# EAGLE board sx1509-breakout (EAGLE 7.1.0)
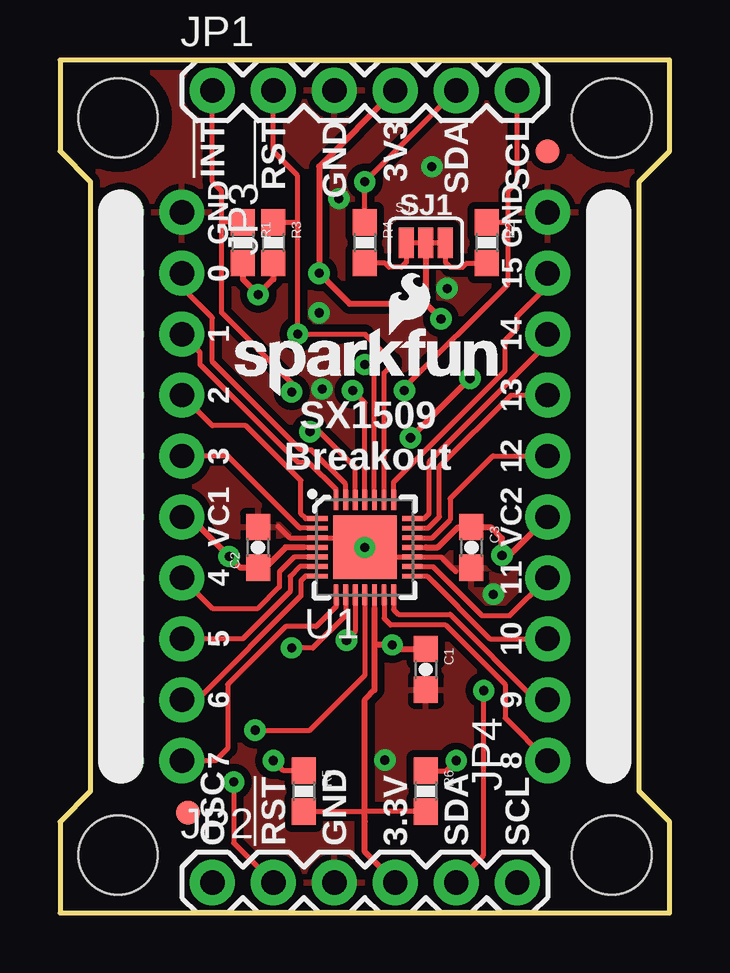
[diagram p0: board, top side]
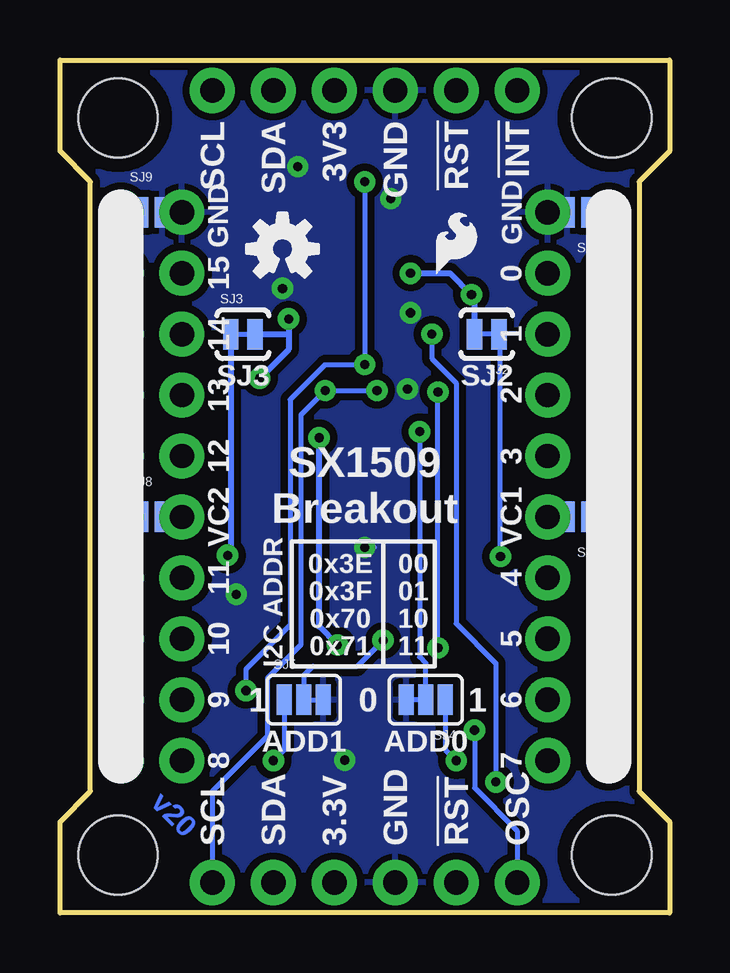
[diagram p1: board, bottom side, seen from below]

Size 25.4 x 35.56 mm. Coordinates in mm from the lower left corner, seen from the top.
Outline: 0,35.56 0,31.75 1.27,30.48 1.27,5.08 0,3.81 0,0 25.4,0 25.4,3.81 24.13,5.08 24.13,30.48 25.4,31.75 25.4,35.56 0,35.56
Copper layers (1*16): Top 0.035mm / dielectric 1.5mm / Bottom 0.035mm
Design rules "SparkFun-2-layer": minimum track width 7mil, minimum drill 15mil, track to track 8mil, track to pad 8mil, pad to pad 8mil, via to via 8mil, smd to smd 8mil, copper to edge 8mil, drill to drill 8mil, minimum pad ring 12mil, minimum via ring 10mil, stop-mask expansion 4mil, vias tented up to drill 20mil, thermal gap 10mil

## Footprints (pad centres in the part's own frame; a part is rotated, then mirrored left to right if it is on the bottom)
0603-CAP = smd 1.1 x 1: 1 -0.85,0; 2 0.85,0
1X06 = drill 1.016 pad 1.88: 1 0,0; 2 2.54,0; 3 5.08,0; 4 7.62,0; 5 10.16,0; 6 12.7,0
2X10_ROUND_NOSILK = drill 1.016 pad 1.88: 1 -11.43,-1.27; 2 -11.43,1.27; 3 -8.89,-1.27; 4 -8.89,1.27; 5 -6.35,-1.27; 6 -6.35,1.27; 7 -3.81,-1.27; 8 -3.81,1.27; 9 -1.27,-1.27; 10 -1.27,1.27; 11 1.27,-1.27; 12 1.27,1.27; 13 3.81,-1.27; 14 3.81,1.27; 15 6.35,-1.27; 16 6.35,1.27; 17 8.89,-1.27; 18 8.89,1.27; 19 11.43,-1.27; 20 11.43,1.27
FIDUCIAL-1X2 = smd 1 x 1: 1 0,0
0603-RES = smd 1.1 x 1: 1 -0.85,0; 2 0.85,0
PAD-JUMPER-3-3OF3_NC_BY_TRACE_YES_SILK_FULL_BOX = smd 0.635 x 1.27: 1 -0.813,0; 2 0,0; 3 0.813,0
PAD-JUMPER-2-NC_BY_TRACE_YES_SILK = smd 0.635 x 1.27: 1 -0.508,0; 2 0.508,0
PAD-JUMPER-3-2OF3_NC_BY_TRACE_YES_SILK_FULL_BOX = smd 0.635 x 1.27: 1 -0.813,0; 2 0,0; 3 0.813,0
PAD-JUMPER-2-NO_NO_SILK = smd 0.635 x 1.27: 1 -0.45,0; 2 0.45,0
STAND-OFF = hole 3.302: 0,0
QFN-28 = smd 0.85 x 0.2: 1 -1.975,1.2; 2 -1.975,0.8; 3 -1.975,0.4; 4 -1.975,0; 5 -1.975,-0.4; 6 -1.975,-0.8; 7 -1.975,-1.2; 15 1.975,-1.2; 16 1.975,-0.8; 17 1.975,-0.4; 18 1.975,0; 19 1.975,0.4; 20 1.975,0.8; 21 1.975,1.2 | smd 0.2 x 0.85: 8 -1.2,-1.975; 9 -0.8,-1.975; 10 -0.4,-1.975; 11 0,-1.975; 12 0.4,-1.975; 13 0.8,-1.975; 14 1.2,-1.975; 22 1.2,1.975; 23 0.8,1.975; 24 0.4,1.975; 25 0,1.975; 26 -0.4,1.975; 27 -0.8,1.975; 28 -1.2,1.975 | smd 2.65 x 2.65: 29 0,0

## Placement (x,y rotation side)
C1  0.1uF  [0603-CAP]  15.24,10.16 270 top
C2  0.1uF  [0603-CAP]  8.26,15.24 90 top
C3  0.1uF  [0603-CAP]  17.14,15.24 270 top
FRAME1  [CREATIVE_COMMONS]  -12.98,-17.78 0 top  (outside the outline)
JP1  [1X06]  6.35,34.29 0 top
JP2  [1X06]  6.35,1.27 0 top
JP3  [2X10_ROUND_NOSILK]  3.81,17.78 270 top
JP4  [2X10_ROUND_NOSILK]  21.59,17.78 90 top
JP9  FIDUCIAL1X2  [FIDUCIAL-1X2]  20.32,31.75 0 top
JP10  FIDUCIAL1X2  [FIDUCIAL-1X2]  5.33,4.19 0 top
LOGO1  SFE_LOGO_NAME_FLAME.1_INCH  [SFE_LOGO_NAME_FLAME_.1]  6.86,21.46 0 top
LOGO2  SFE_LOGO_FLAME.1_INCH  [SFE_LOGO_FLAME_.1]  10.03,26.29 0 bottom
LOGO3  OSHW-LOGOS  [OSHW-LOGO-S]  16.13,27.69 0 bottom
R1  10K  [0603-RES]  7.62,27.94 270 top
R2  10K  [0603-RES]  17.78,27.94 270 top
R3  10K  [0603-RES]  8.89,27.94 270 top
R4  10K  [0603-RES]  12.7,27.94 270 top
R5  10K  [0603-RES]  10.16,5.08 270 top
R6  10K  [0603-RES]  15.24,5.08 270 top
SJ1  [PAD-JUMPER-3-3OF3_NC_BY_TRACE_YES_SILK_FULL_BOX]  15.24,27.94 0 top
SJ2  [PAD-JUMPER-2-NC_BY_TRACE_YES_SILK]  7.62,24.13 180 bottom
SJ3  [PAD-JUMPER-2-NC_BY_TRACE_YES_SILK]  17.78,24.13 0 bottom
SJ4  [PAD-JUMPER-3-2OF3_NC_BY_TRACE_YES_SILK_FULL_BOX]  10.16,8.89 180 bottom
SJ5  [PAD-JUMPER-3-2OF3_NC_BY_TRACE_YES_SILK_FULL_BOX]  15.24,8.89 0 bottom
SJ6  A-VCC1  [PAD-JUMPER-2-NO_NO_SILK]  3.81,16.51 180 bottom
SJ7  A-GND  [PAD-JUMPER-2-NO_NO_SILK]  3.81,29.21 180 bottom
SJ8  B-VCC2  [PAD-JUMPER-2-NO_NO_SILK]  21.59,16.51 0 bottom
SJ9  B-GND  [PAD-JUMPER-2-NO_NO_SILK]  21.59,29.21 0 bottom
STANDOFF1  STAND-OFF  [STAND-OFF]  2.41,2.41 0 top
STANDOFF2  STAND-OFF  [STAND-OFF]  2.41,33.15 0 top
STANDOFF3  STAND-OFF  [STAND-OFF]  22.99,2.41 0 top
STANDOFF4  STAND-OFF  [STAND-OFF]  22.99,33.15 0 top
U1  SX1509  [QFN-28]  12.7,15.24 0 top

## Library data of the parts
C1-C3 = SparkFun-Capacitors; PROD_ID: CAP-00810
FRAME1 = SparkFun-Aesthetics; DESIGNER: NAME; VERSION: v01
JP1 JP2 = SparkFun-Connectors; PROD_ID: CONN-08437
JP3 JP4 = SparkFun-Connectors
JP9 JP10 = SparkFun
LOGO1-LOGO3 = SparkFun-Aesthetics
R1-R6 = SparkFun-Resistors; PROD_ID: RES-00824
SJ1-SJ9 = SparkFun-Passives
STANDOFF1-STANDOFF4 = SparkFun-Electromechanical
U1 = SparkFun-DigitalIC; PROD_ID: IC-11311

## Nets
0: JP3.4 U1.27
1: JP3.6 U1.28
2: JP3.8 U1.1
3: JP3.10 U1.2
3.3V: C1.1 JP1.4 JP2.4 R1.2 R3.2 R5.2 R6.2 SJ1.2 SJ2.2 SJ3.2 U1.12
4: JP3.14 U1.5
5: JP3.16 U1.6
6: JP3.18 U1.7
7: JP3.20 U1.8
8: JP4.2 U1.13
9: JP4.4 U1.14
10: JP4.6 U1.15
11: JP4.8 U1.16
12: JP4.12 U1.19
13: JP4.14 U1.20
14: JP4.16 U1.21
15: JP4.18 U1.22
!INT: JP1.1 R1.1 U1.9
!RESET: JP1.2 JP2.2 R3.1 U1.23
ADDR0: SJ4.2 U1.26
ADDR1: SJ5.2 U1.10
GND: C1.2 C2.2 C3.2 JP1.3 JP2.3 JP3.2 JP4.20 SJ4.3 SJ5.3 SJ7.2 SJ9.2 U1.3 U1.17 U1.29
N$1: R2.2 SJ1.3
N$2: R4.2 SJ1.1
N$3: JP4.1 JP4.3 JP4.5 JP4.7 JP4.9 JP4.11 JP4.13 JP4.15 JP4.17 JP4.19 SJ8.1 SJ9.1
N$8: R5.1 SJ4.1
N$9: R6.1 SJ5.1
OSCIO: JP2.1 U1.11
PWRBUSA: JP3.1 JP3.3 JP3.5 JP3.7 JP3.9 JP3.11 JP3.13 JP3.15 JP3.17 JP3.19 SJ6.1 SJ7.1
SCL: JP1.6 JP2.6 R2.1 U1.25
SDA: JP1.5 JP2.5 R4.1 U1.24
VCC1: C2.1 JP3.12 SJ2.1 SJ6.2 U1.4
VCC2: C3.1 JP4.10 SJ3.1 SJ8.2 U1.18

## Tracks (layer width: path | path; a pad name or v marks a point on that pad's centre or on a via)
0
  Top 0.203: U1.27 11.9,17.88 10.48,19.3 10.03,19.3 6.35,22.99 6.35,24.82 5.08,26.09 JP3.4
1
  Top 0.203: U1.28 11.5,17.65 10.35,18.8 9.91,18.8 5.84,22.86 5.84,23.37 JP3.6
2
  Top 0.203: U1.1 10.23,16.44 10.03,16.64 10.03,18.03 7.75,20.32 6.35,20.32 JP3.8
3
  Top 0.203: U1.2 9.99,16.04 6.99,19.05 JP3.10
3.3V  (via drill 0.38)
  Top 0.203: U1.12 13.1,12.7 | R5.2 12.7,4.23 | R6.2 12.7,4.23 | 12.7,4.23 12.7,3.81
  Top 0.254: JP1.4 10.79,31.11 v10.79,26.67 12.06,25.4 15.24,25.4 | SJ1.2 15.24,25.4 | v15.88,24.77 15.24,25.4 | R1.2 7.62,26.42 v8.26,25.78 8.89,26.42 R3.2 | JP2.4 12.7,2.54 12.7,3.81 12.7,8.89 13.1,9.29 13.1,11.18 | 13.1,11.18 v13.84,11.18 14.01,11.01 C1.1 | 13.1,12.7 13.1,11.18 | v17.08,22.29 v14.61,19.81
  Bottom 0.254: SJ2.2 8.13,25.65 v8.26,25.78 9.14,26.67 v10.79,26.67 | v15.88,24.77 15.88,24.13 | 15.88,24.13 15.88,23.5 v17.08,22.29 | SJ3.2 15.88,24.13 | v13.84,11.18 14.61,11.94 v14.61,19.81
4
  Top 0.203: U1.5 9.76,14.84 9.14,14.22 9.14,13.59 8.26,12.7 6.35,12.7 JP3.14
5
  Top 0.203: U1.6 9.99,14.44 9.59,14.03 9.59,13.4 7.62,11.43 JP3.16
6
  Top 0.203: U1.7 10.23,14.04 10.03,13.84 10.03,13.21 5.71,8.89 JP3.18
7
  Top 0.203: U1.8 11.5,12.77 10.67,11.94 9.4,11.94 6.99,9.53 6.99,6.86 6.48,6.35 JP3.20
8
  Top 0.203: U1.13 13.5,12.28 13.78,12 16.07,12 18.54,9.53 18.54,8.13 JP4.2
9
  Top 0.203: U1.14 13.9,12.64 14.1,12.45 16.26,12.45 19.81,8.89 JP4.4
10
  Top 0.203: U1.15 15.3,14.04 17.91,11.43 JP4.6
11
  Top 0.203: U1.16 15.53,14.44 17.58,12.39 18.75,12.39 JP4.8
12
  Top 0.203: U1.19 15.51,15.64 16.26,16.38 16.26,17.27 18.03,19.05 JP4.12
13
  Top 0.203: U1.20 15.34,16.04 15.81,16.51 15.81,18.61 18.8,21.59 JP4.14
14
  Top 0.203: U1.21 15.17,16.44 15.37,16.64 15.37,18.8 20.32,23.75 JP4.16
15
  Top 0.203: U1.22 13.9,17.96 18.54,22.61 18.54,23.88 19.05,24.38 19.05,24.89 20.32,26.16 JP4.18
!INT  (via drill 0.38)
  Top 0.203: U1.9 11.9,12.41 10.54,11.05 v9.65,11.05 | 6.73,28.79 6.73,30.1 6.35,30.48 JP1.1 | R1.1 6.73,28.79 | v9.65,21.72 9.65,22.1 6.73,25.02 6.73,28.79
  Bottom 0.203: v9.65,11.05 v9.65,21.72
!RESET  (via drill 0.38)
  Top 0.203: U1.23 13.5,22.52 13.84,22.86 13.84,22.99 12.7,24.13 v9.91,24.13 9.91,28.79 | JP1.2 8.89,31.75 9.91,30.73 9.91,28.79 | R3.1 9.91,28.79 | v7.24,5.46 7.24,2.92 JP2.2
  Bottom 0.203: v9.91,24.13 9.91,23.11 8.89,22.1 8.89,12.06 7.24,10.41 v7.24,5.46
ADDR0  (via drill 0.38)
  Top 0.203: U1.26 12.3,18.56 10.79,20.07 v10.41,20.07
  Bottom 0.203: v10.41,20.07 10.41,10.67 10.16,10.41 SJ4.2
ADDR1  (via drill 0.38)
  Top 0.203: U1.10 12.3,11.73 v11.94,11.37
  Bottom 0.203: SJ5.2 15.24,9.91 14.86,10.29 13.02,10.29 v11.94,11.37
GND  (via drill 0.38)
  Top 0.203: 12.7,15.64 U1.29 | 16.51,14.22 15.89,14.84 U1.17 13.1,14.84 U1.29 | 9.08,16.13 9.57,15.64 U1.3 12.3,15.64 U1.29
  Bottom 0.203: U1.29 12.3,15.24
  other vias: 12.7,15.24 10.92,21.84 10.79,25.02 11.62,29.78 16.13,26.04 15.49,31.11 13.54,6.38 18.06,13.28
  pour Top (isolate 0.305): 0,35.56 0,0 25.4,0 25.4,35.56
  pour Bottom (isolate 0.305): 0,35.56 0,0 25.4,0 25.4,35.56
N$1
  Top 0.203: SJ1.3 16.05,27.13 16.26,26.92 16.76,26.92 16.93,27.09 R2.2
N$2
  Top 0.203: SJ1.1 14.43,27.13 14.22,26.92 13.72,26.92 13.55,27.09 R4.2
N$3
  Top 0.254: JP4.19 JP4.17 JP4.15 JP4.13 JP4.11 JP4.9 JP4.7 JP4.5 JP4.3 JP4.1
  Bottom 0.203: SJ9.1 JP4.19 | SJ8.1 JP4.9
N$8  (via drill 0.38)
  Top 0.203: R5.1 9.31,5.93 v8.89,6.35
  Bottom 0.203: SJ4.1 9.35,6.81 v8.89,6.35
N$9  (via drill 0.38)
  Top 0.203: R6.1 16.09,5.93 v16.51,6.35
  Bottom 0.203: SJ5.1 16.05,6.81 v16.51,6.35
OSCIO  (via drill 0.38)
  Top 0.203: U1.11 12.7,9.91 10.41,7.62 v8.13,7.62
  Bottom 0.203: v8.13,7.62 8.13,5.21 6.35,3.43 JP2.1
PWRBUSA
  Top 0.254: JP3.19 JP3.17 JP3.15 JP3.13 JP3.11 JP3.9 JP3.7 JP3.5 JP3.3 JP3.1
  Bottom 0.203: SJ7.1 JP3.1 | SJ6.1 JP3.11
SCL  (via drill 0.38)
  Top 0.203: U1.25 12.7,21.27 v12.19,21.78 | 18.67,28.79 18.67,26.23 14.35,21.91 v14.35,21.78 | 18.67,28.79 18.67,30.1 19.05,30.48 JP1.6 | R2.1 18.67,28.79
  Bottom 0.203: v12.19,21.78 v14.35,21.78 15.37,20.77 15.37,11.18 16.76,9.78 16.76,7.37 19.05,5.08 JP2.6
SDA  (via drill 0.38)
  Top 0.203: U1.24 13.1,22.46 v12.7,22.86 | JP1.5 v12.7,30.48 R4.1 | JP2.5 17.65,2.41 v17.65,9.27
  Bottom 0.203: v17.65,9.27 17.65,10.16 15.81,12 15.81,21.4 14.35,22.86 v12.7,22.86 v12.7,30.48
VCC1  (via drill 0.38)
  Top 0.203: U1.4 10.16,15.24
  Top 0.254: 10.16,15.24 9.4,15.24 8.55,14.39 C2.1 7.52,14.39 v7.05,14.86 5.4,16.51 JP3.12
  Bottom 0.203: v7.05,14.86 7.05,24.07 SJ2.1 | SJ6.2 JP3.12
VCC2  (via drill 0.38)
  Top 0.203: U1.18 15.24,15.24
  Top 0.254: 15.24,15.24 15.75,15.24 16.6,16.09 C3.1 17.95,16.09 18.41,15.62 v18.41,14.91 18.72,14.91 JP4.10
  Bottom 0.203: SJ8.2 JP4.10
  Bottom 0.254: SJ3.1 18.29,15.04 v18.41,14.91

## Text on the board
Bottom: v20
tPlace: !INT | !RST | GND | 3V3 | SDA | SCL | GND | SJ1 | GND | 0 | 15 | 1 | 14 | 2 | 13 | SX1509 / Breakout | 3 | 12 | VC1 | VC2 | 4 | 11 | 5 | 10 | 6 | 9 | 7 | 8 | OSC | !RST | GND | 3.3V | SDA | SCL
bPlace: !INT | !RST | GND | 3V3 | SDA | SCL | GND | GND | 0 | 15 | 1 | 14 | SJ2 | SJ3 | 2 | 13 | 3 | 12 | VC1 | VC2 | SX1509 / Breakout | 00 | 0x3E | 4 | 01 | 0x3F | 11 | 10 | 0x70 | I2C ADDR | 11 | 0x71 | 5 | 10 | 6 | 1 | 0 | 1 | 9 | ADD0 | ADD1 | 7 | 8 | OSC | !RST | GND | 3.3V | SDA | SCL
Measures: Units: inches
tDocu: Jim Lindblom